# EAGLE board feedback_PCB (EAGLE 8.6.0)
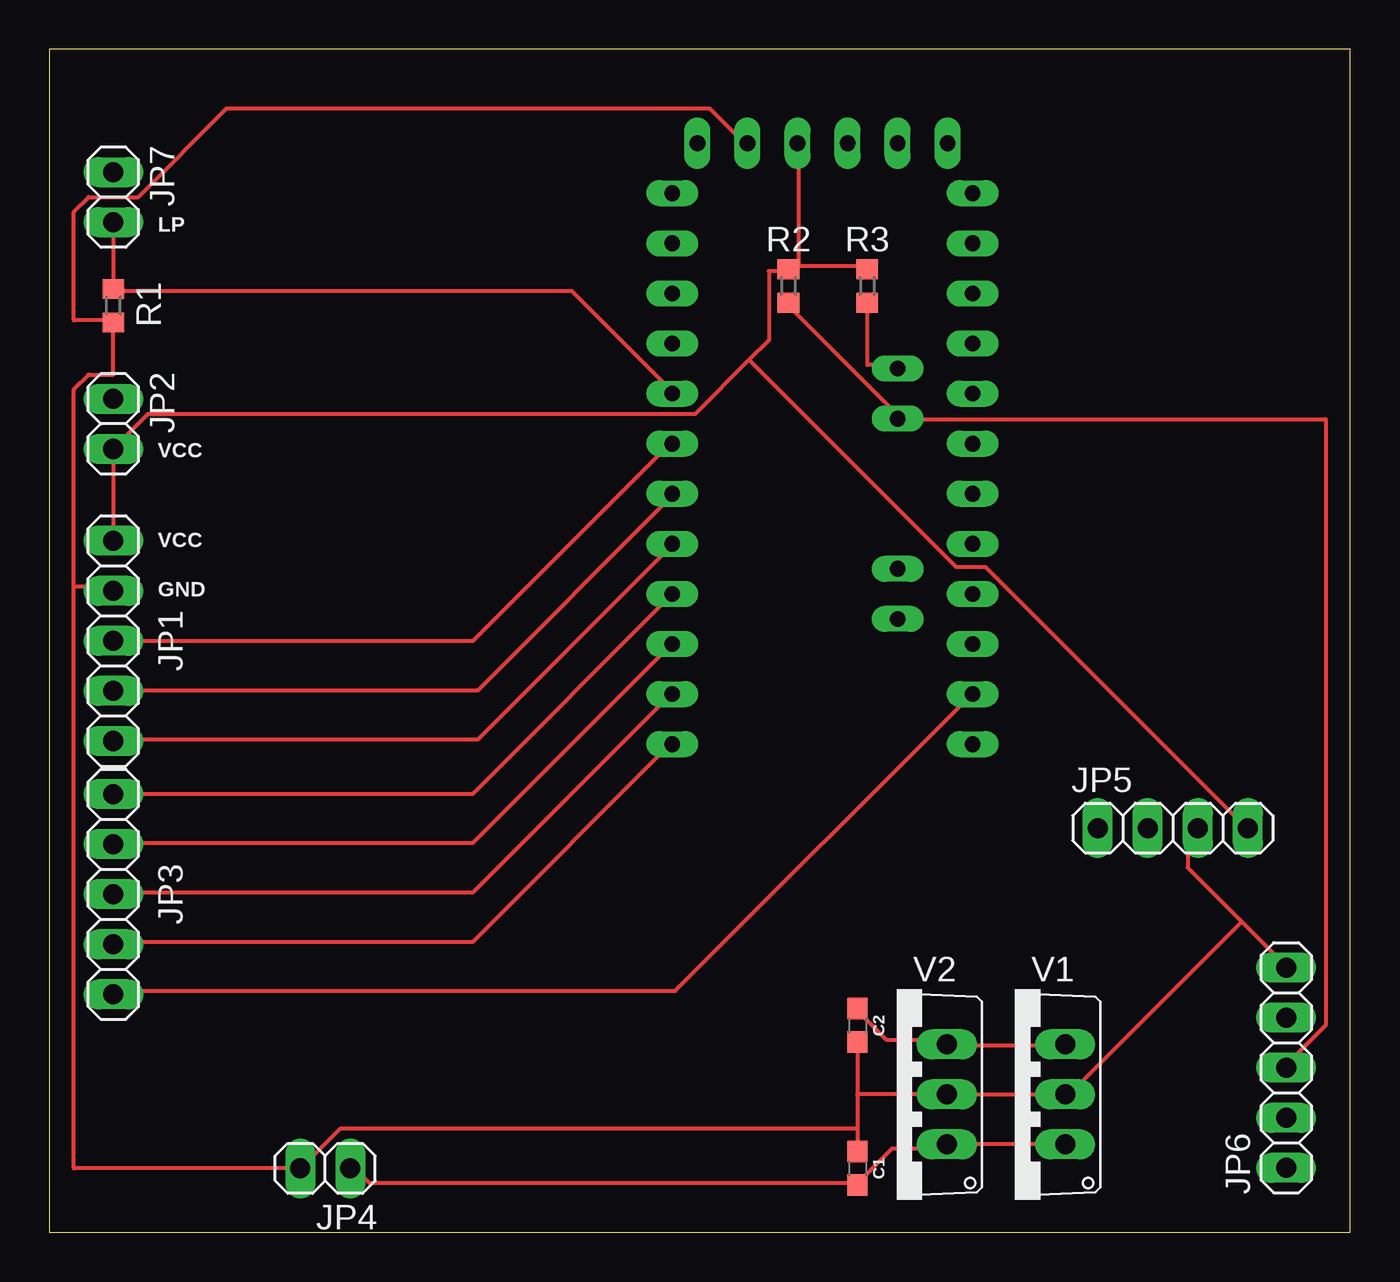
[diagram p0: board, top side]
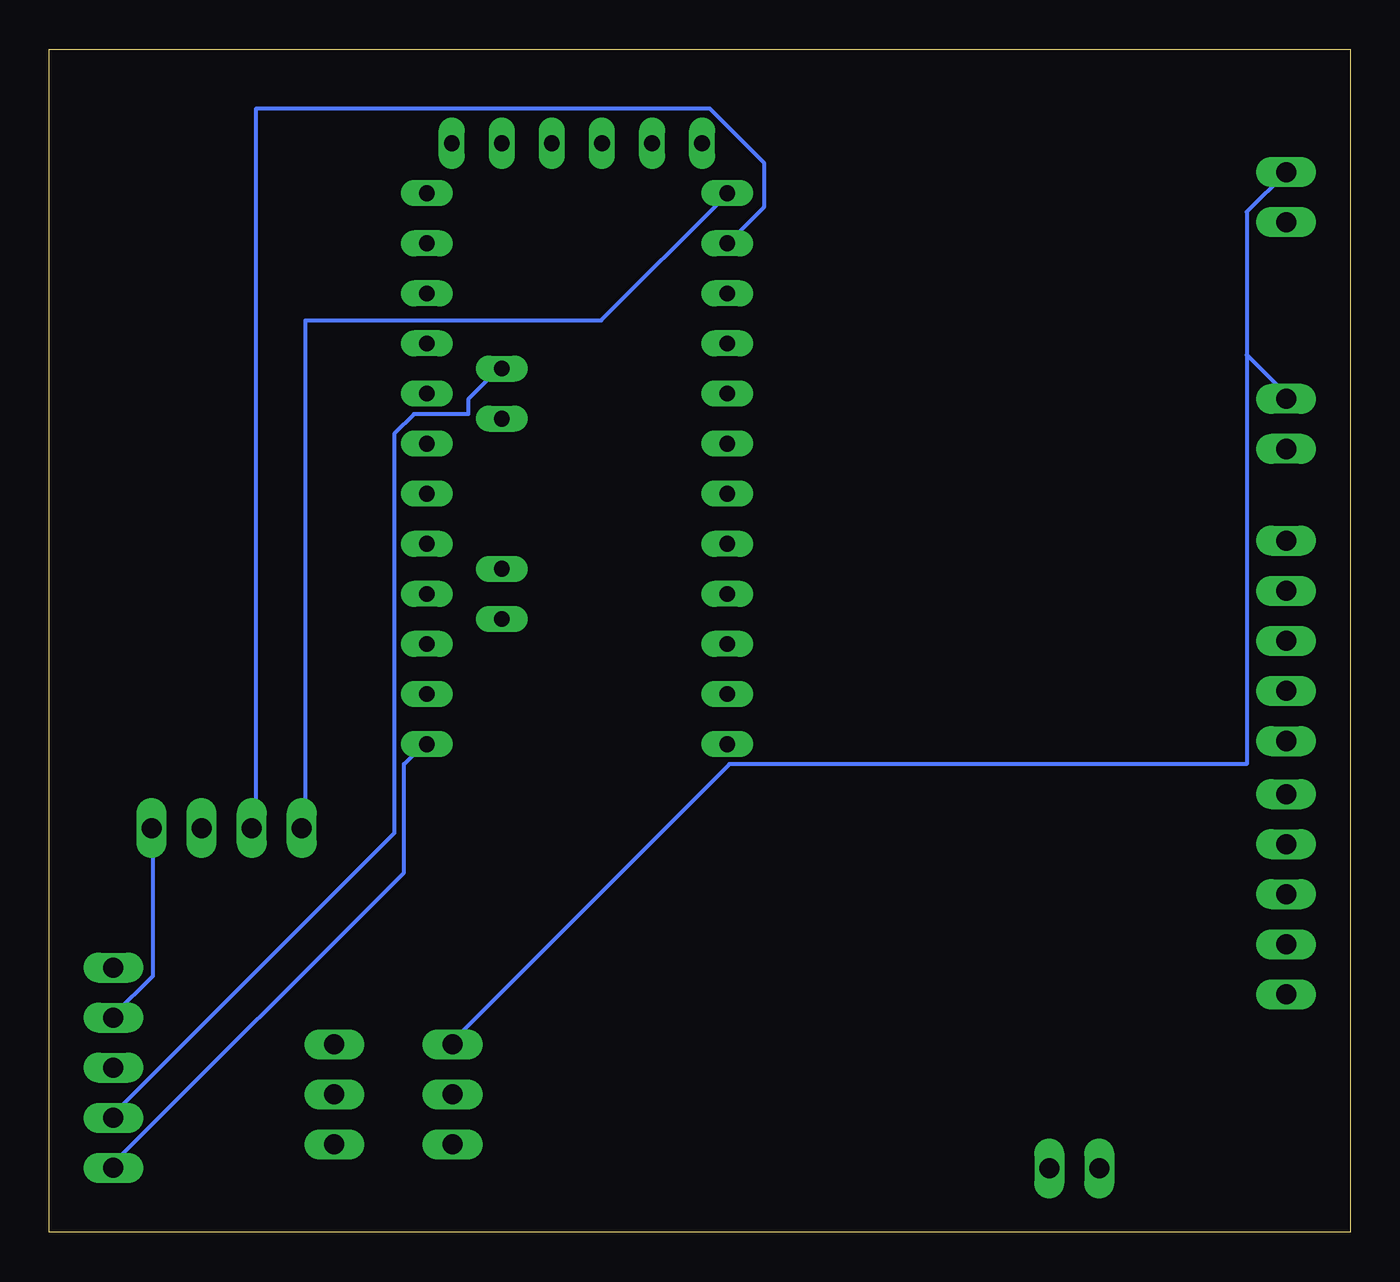
[diagram p1: board, bottom side, seen from below]

Size 66 x 60 mm. Coordinates in mm from the lower left corner, seen from the top.
Outline: 0,0 66,0 66,60 0,60 0,0
Copper layers (1*16): Top 0.035mm / dielectric 1.5mm / Bottom 0.035mm
Design rules "default *": minimum track width 8mil, minimum drill 0.35mm, track to track 8mil, track to pad 8mil, pad to pad 8mil, via to via 8mil, smd to smd 8mil, copper to edge 40mil, drill to drill 8mil, minimum pad ring 10mil, minimum via ring 8mil, stop-mask expansion 4mil, vias tented up to drill 0mil, thermal gap 10mil

## Footprints (pad centres in the part's own frame; a part is rotated, then mirrored left to right if it is on the bottom)
0603 = smd 1.1 x 1: 1 -0.85,0; 2 0.85,0
1X05 = drill 1.016 long: 1 -5.08,0; 2 -2.54,0; 3 0,0; 4 2.54,0; 5 5.08,0
1X02 = drill 1.016 long: 1 -1.27,0; 2 1.27,0
1X04 = drill 1.016 long: 1 -3.81,0; 2 -1.27,0; 3 1.27,0; 4 3.81,0
R0603 = smd 1 x 1.1: 1 -0.85,0; 2 0.85,0
PRO-MINI-2 = drill 0.8 long: A0 6.35,2.54; A1 6.35,0; A2 6.35,-2.54; A3 6.35,-5.08; A4 2.54,1.27; A5 2.54,3.81; A6 2.54,-8.89; A7 2.54,-6.35; D2 -8.89,2.54; D3 -8.89,0; D4 -8.89,-2.54; D5 -8.89,-5.08; D6 -8.89,-7.62; D7 -8.89,-10.16; D8 -8.89,-12.7; D9 -8.89,-15.24; D10 6.35,-15.24; D11 6.35,-12.7; D12 6.35,-10.16; D13 6.35,-7.62; DTR 5.08,15.24; GND 6.35,10.16; GND1 -8.89,5.08; GND2 -7.62,15.24; GND3 -5.08,15.24; RAW 6.35,12.7; RST 6.35,7.62; RST1 -8.89,7.62; RX1 -8.89,10.16; RX1-1 0,15.24; TX0 -8.89,12.7; TX0-1 2.54,15.24; VCC 6.35,5.08; VCC1 -2.54,15.24
TO220V = drill 1.016 long: 1 -2.54,-2.54; 2 0,-2.54; 3 2.54,-2.54

## Placement (x,y rotation side)
C1  4.7uF  [0603]  41,3.25 270 top
C2  4.7uF  [0603]  41,10.5 270 top
JP1  [1X05]  3.25,30 90 top
JP2  [1X02]  3.25,41 270 top
JP3  [1X05]  3.25,17.15 90 top
JP4  [1X02]  14,3.25 180 top
JP5  [1X04]  57,20.5 0 top
JP6  [1X05]  62.75,8.35 90 top
JP7  [1X02]  3.25,52.5 270 top
R1  10k  [R0603]  3.25,47 90 top
R2  10k  [R0603]  37.5,48 90 top
R3  10k  [R0603]  41.5,48 270 top
U$1  PRO-MINI-2  [PRO-MINI-2]  40.5,40 0 top
V1  UCC283T-3  [TO220V]  49,7 90 top
V2  UCC283T-3  [TO220V]  43,7 90 top

## Library data of the parts
C1 C2 = SparkFun-Capacitors; PROD_ID: CAP-08280
JP1-JP7 = pinhead
R1-R3 = resistor
U$1 = Arduino-clone
V1 V2 = SeanSylwester

## Nets
BAT: C1.2 JP4.1 V1.1 V2.1
GND: C1.1 C2.2 JP1.4 JP4.2 JP5.3 JP6.5 R1.1 U$1.GND3 V1.2 V2.2
INT: JP6.1 U$1.D10
LP: JP7.2 R1.2 U$1.D2
N$1: JP3.1 U$1.D11
N$2: JP3.2 U$1.D9
N$3: JP3.3 U$1.D8
N$4: JP3.4 U$1.D7
N$5: JP3.5 U$1.D6
N$6: JP1.1 U$1.D5
N$7: JP1.2 U$1.D4
N$8: JP1.3 U$1.D3
REG: C2.1 JP2.1 JP7.1 V1.3 V2.3
RX: JP5.2 U$1.RX1
SCL: JP6.2 R3.2 U$1.A5
SDA: JP6.3 R2.1 U$1.A4
TX: JP5.1 U$1.TX0
VCC: JP1.5 JP2.2 JP5.4 JP6.4 R2.2 R3.1 U$1.VCC1

## Tracks (layer width: path | path; a pad name or v marks a point on that pad's centre or on a via)
BAT
  Top 0.203: 41,2.5 42.75,4.25 45.5,4.25 V2.1 45.75,4.5 51.5,4.5 V1.1 | 41,2.5 16.25,2.5 15.5,3.25 JP4.1 | 41,2.5 C1.2
GND
  Top 0.203: 1.25,32.75 1.25,42.75 2,43.5 3.25,43.5 R1.1 3.25,46.25 1.25,46.25 1.25,51.75 2,52.5 4.5,52.5 9,57 33.5,57 35.25,55.25 U$1.GND3 | 1.25,32.75 3.25,32.75 JP1.4 | 60.5,15.75 57.75,18.5 57.75,20.5 JP5.3 | 60.5,15.75 62.75,13.5 JP6.5 | C2.2 41,7 | 41,7 41,5.25 | 41,5.25 C1.1 | 41,7 V2.2 V1.2 51.75,7 60.5,15.75 | 41,5.25 14.75,5.25 12.75,3.25 JP4.2 1.25,3.25 1.25,32.75
INT
  Bottom 0.203: U$1.D10 47,24.75 48,23.75 48,18.25 62.75,3.5 JP6.1
LP
  Top 0.203: JP7.2 R1.2 3.25,47.75 26.5,47.75 31.5,42.75 U$1.D2
N$1
  Top 0.203: U$1.D11 46.75,27.25 31.75,12.25 3.25,12.25 JP3.1
N$2
  Top 0.203: U$1.D9 31.5,24.75 21.5,14.75 3.25,14.75 JP3.2
N$3
  Top 0.203: U$1.D8 31.5,27.25 21.5,17.25 3.25,17.25 JP3.3
N$4
  Top 0.203: U$1.D7 31.5,29.75 21.5,19.75 3.25,19.75 JP3.4
N$5
  Top 0.203: U$1.D6 31.5,32.25 21.5,22.25 3.25,22.25 JP3.5
N$6
  Top 0.203: U$1.D5 31.5,34.75 21.75,25 3.25,25 JP1.1
N$7
  Top 0.203: U$1.D4 31.5,37.25 21.75,27.5 3.25,27.5 JP1.2
N$8
  Top 0.203: JP1.3 21.5,30 31.5,40 U$1.D3
REG
  Top 0.203: C2.1 41,11.25 42.5,9.75 45.5,9.75 V2.3 45.75,9.5 51.5,9.5 V1.3
  Bottom 0.203: 5.25,44.5 3.25,42.5 JP2.1 | 5.25,44.5 5.25,51.75 3.25,53.75 JP7.1 | 5.25,44.5 5.25,23.75 31.5,23.75 45.5,9.75 V2.3
RX
  Bottom 0.203: U$1.RX1 31.5,50.25 29.75,52 29.75,54.25 32.5,57 55.5,57 55.5,20.5 JP5.2
SCL
  Top 0.203: R3.2 41.5,44 43,44 U$1.A5
  Bottom 0.203: JP6.2 62.75,6 48.5,20.25 48.5,40.5 47.5,41.5 44.75,41.5 44.75,42.25 43.25,43.75 U$1.A5
SDA
  Top 0.203: R2.1 37.5,47 43,41.5 U$1.A4 43.25,41.25 64.75,41.25 64.75,10.5 62.75,8.5 JP6.3
TX
  Bottom 0.203: U$1.TX0 31.75,52.5 38,46.25 53,46.25 53,20.5 JP5.1
VCC
  Top 0.203: JP1.5 JP2.2 3.25,39.75 5,41.5 32.75,41.5 35.5,44.25 | 38,49 41.5,49 R3.1 | 38,49 37.5,49 R2.2 | 38,49 38,55 U$1.VCC1 | 38,49 R2.2 | 35.5,44.25 36.5,45.25 36.5,48.75 37.5,48.75 R2.2 | 35.5,44.25 46,33.75 47.5,33.75 60.75,20.5 JP5.4
  Bottom 0.203: JP6.4 62.75,11 60.75,13 60.75,20.5 JP5.4

## Text on the board
tNames: LP | VCC | VCC | GND